# Altium PCB PCB1.PcbDoc
Units mil, origin at the board's own origin, x right, y up, seen from the top; angles counter-clockwise.
Board outline 3890 x 1915 mil, 2 copper layers (Top Layer, Bottom Layer); 30 components, 19 nets, 76 pads, 0 vias.
Unrouted connection lines stored in the file: 55.
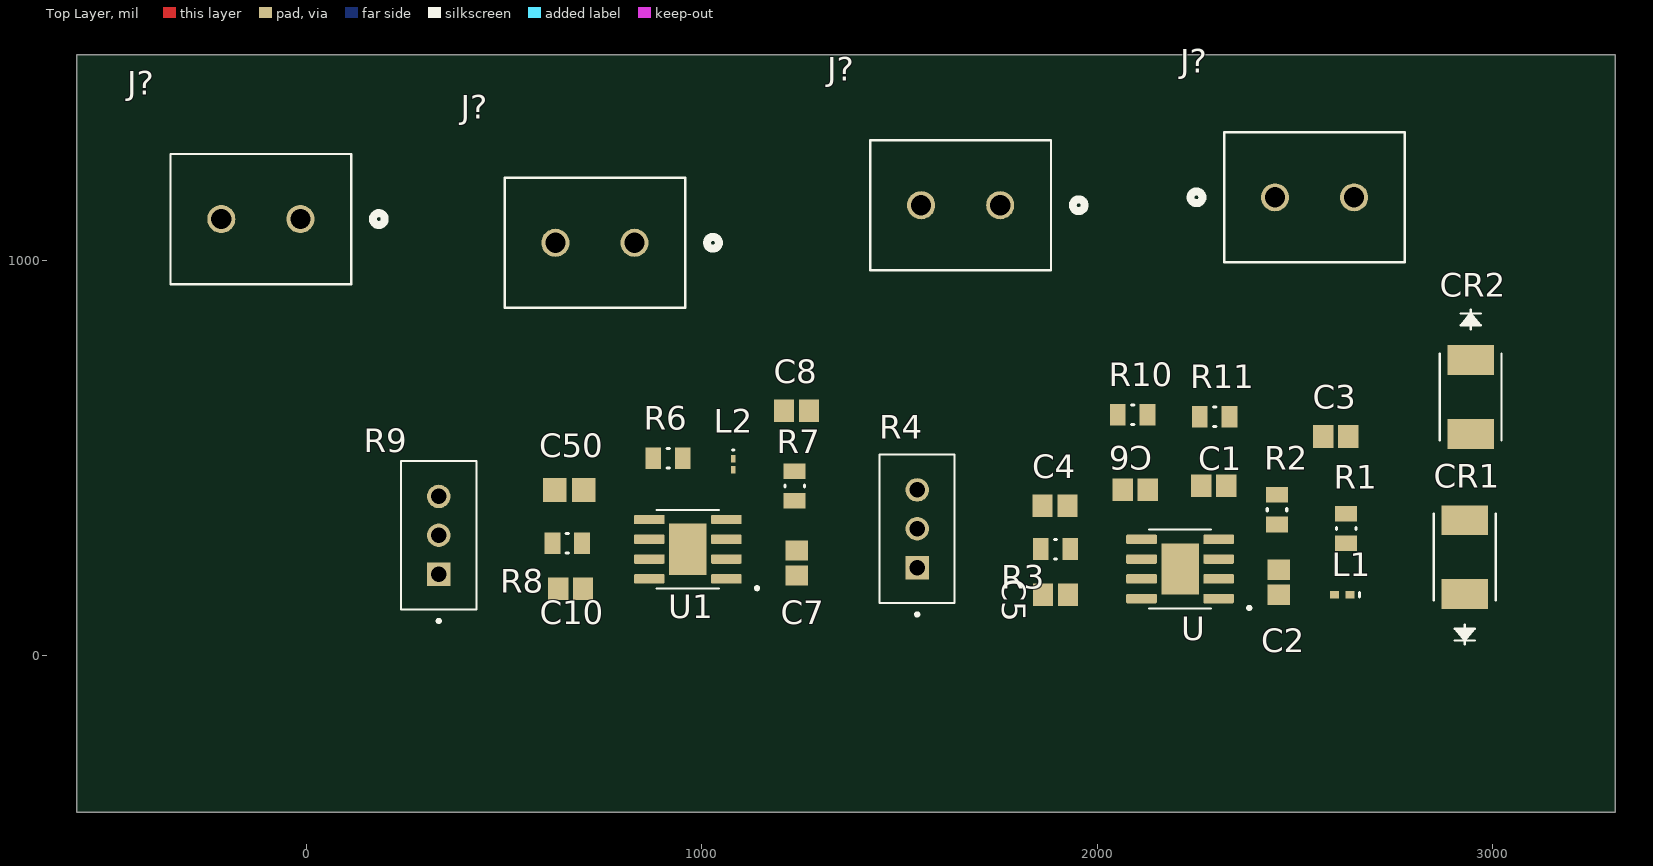
[diagram p0: Top Layer view]
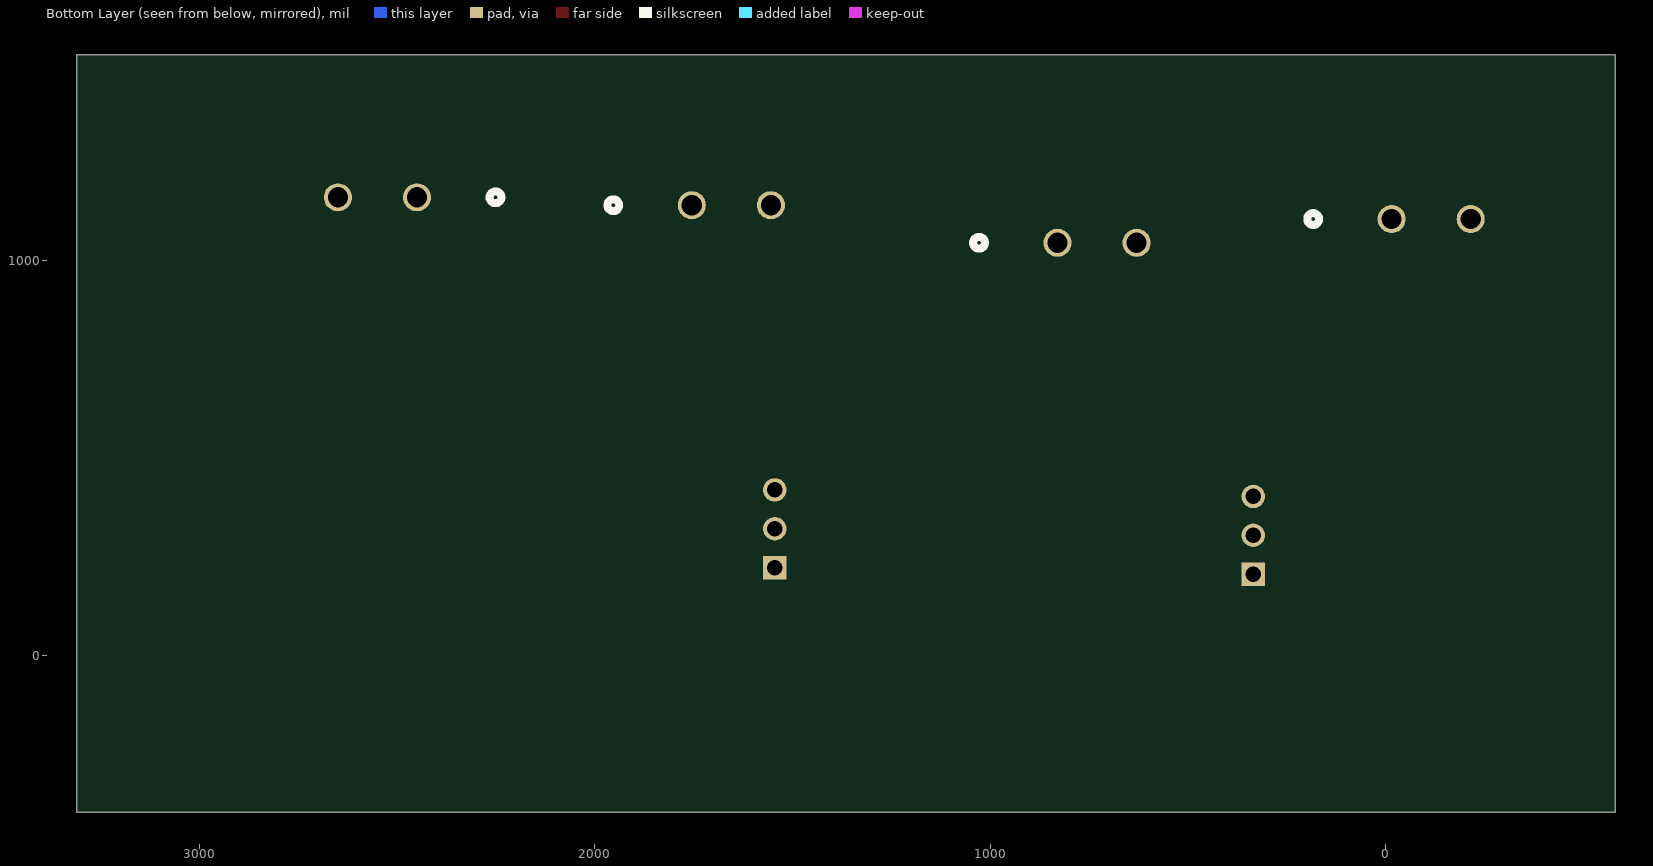
[diagram p1: Bottom Layer view, seen from below]

## Layer stack, top to bottom
Top Solder: solder mask 0.4, Solder Resist, Dk 3.5
Top Layer: signal copper 1.4
Dielectric 1: dielectric 12.6, FR-4, Dk 4.8
Bottom Layer: signal copper 1.4
Bottom Solder: solder mask 0.4, Solder Resist, Dk 3.5

## Board outline
-580,-395 3310,-395 3310,1520 -580,1520

## Design rules (kind name [scope] priority, off if disabled: settings)
Clearance [All] p1: gap=10 ignorepadtopadclearanceinfootprint=FALSE except(0: Arc-Hole Track-Hole SMDPad-Hole THPad-Hole Via-Hole Fill-Hole Poly-Hole Region-Hole Text-Hole)
PolygonConnect [All] p1: connectstyle=Relief reliefconductorwidth=10 reliefentries=4 polygonreliefangle="90 Angle" airgapwidth=10
RoomDefinition Powerboard_schematic [InComponentClass('Powerboard_schematic')] p1: confinementstyle=ConfineIn formatcopy=TRUE lockcomponents=FALSE outline 5930,-335 6350,-335 6350,150 5930,150
RoutingVias [All] p1: holewidth=28 width=50 viastyle="Through Hole" minholewidth=28 minwidth=50 maxholewidth=28 maxwidth=50
SolderMaskExpansion [All] p1: expansion=4 istentingtop=FALSE
Width [All] p1: maxlimit=10 minlimit=10 preferedwidth=10
30 further rules are at their usual default settings.

## Classes and differential pairs
component class Powerboard_schematic: C1 C2 C3 C4 C5 C6 C7 C8 C10 C50 CR1 CR2 J? L1 L2 R1 R2 R3 R4 R6 R7 R8 R9 R10 R11 U U1

## Components (designator, comment, footprint, x,y, rotation, side; value= is the part's Value field where it differs from the comment)
C1 "08055C104K4Z2A" CAPC2013X140X50NL20T25 2295,430 r180 top
C2 "08055C104K4Z2A" CAPC2013X140X50NL20T25 2460,186.5 r270 top
C3 "08055C104K4Z2A" CAPC2013X140X50NL20T25 2603.5,555 r0 top
C4 "08055C104K4Z2A" CAPC2013X140X50NL20T25 1893.5,380 r180 top
C5 "08055C104K4Z2A" CAPC2013X140X50NL20T25 1895,155 r0 top
C6 "08055C104K4Z2A" CAPC2013X140X50NL20T25 2096.5,420 r180 top
C7 "08055C104K4Z2A" CAPC2013X140X50NL20T25 1240,235 r270 top
C8 "08055C104K4Z2A" CAPC2013X140X50NL20T25 1240,620 r180 top
C10 "08055C104K4Z2A" CAPC2013X140X50NL20T25 668.5,170 r0 top
C50 "VJ0805A1R0CXACW1BC" CAPC2013X145X48ML20T23 665,420 r0 top
CR1 "SD2114S040S8R0" SD2114_AVX 2930,250 r90 top
CR2 "SD2114S040S8R0" SD2114_AVX 2945,655 r270 top
J? "691213510002" CONN_691213510002_WRE 1755,1140 r180 top
J? "691213510002" CONN_691213510002_WRE -15,1105 r180 top
J? "691213510002" CONN_691213510002_WRE 830,1045 r180 top
J? "691213510002" CONN_691213510002_WRE 2450,1160 r0 top
L1 "CTDO1813PF-223HC" 0402-A 2620,155 r180 top
L2 "CTDO1813PF-223HC" 0603 1080,485 r270 top
R1 "CRCW08051M00FKEA" FP-CRCW0805-e3-IPC_B 2630,322.44 r90 top
R2 "CRCW08051M00FKEA" FP-CRCW0805-e3-IPC_B 2455,370 r90 top
R3 "CRCW08051M00FKEA" FP-CRCW0805-e3-IPC_B 1895,270 r0 top
R4 "PV36W105C01B00" TRIM_PV36W105C01B00 1545,321.58 r90 top
R6 "CRCW08051M00FKEA" FP-CRCW0805-e3-IPC_B 915,500 r0 top
R7 "CRCW08051M00FKEA" FP-CRCW0805-e3-IPC_B 1235,430 r90 top
R8 "CRCW08051M00FKEA" FP-CRCW0805-e3-IPC_B 660,285 r0 top
R9 "PV36W105C01B00" TRIM_PV36W105C01B00 335,305 r90 top
R10 "CRCW08051M00FKEA" FP-CRCW0805-e3-IPC_B 2090,610 r180 top
R11 "CRCW08051M00FKEA" FP-CRCW0805-e3-IPC_B 2297.44,605 r180 top
U "AOZ1284PI" SOP127P600X170-9N 2210,220 r180 top
U1 "AOZ1284PI" SOP127P600X170-9N 965,270 r180 top

## Footprints (in the part's own frame and the unit in brackets; to place one, negate y for a bottom-side part, rotate by r counter-clockwise, add the part's x,y. Pads: shape width x height; smd on the part's side, far side on the other; paste and mask are expansions set on the pad)
0402-A [mm] "Chip Inductor, Body 1.0x0.5mm, IPC High Density"
  rect 0.6x0.5 smd: 1(-0.5,0) 2(0.5,0)
  silkscreen extent -1.1,-0.15 -1.1,0.15, body extent -0.55,-0.3 0.55,0.3, height 0.55
0603 [mm] "Chip Inductor, Body 0.6x0.3mm, IPC High Density"
  rect 0.5x0.3 smd: 1(-0.35,0) 2(0.35,0)
  silkscreen extent -0.9,-0.05 -0.9,0.05, body extent -0.33,-0.18 0.33,0.18, height 0.55
CAPC2013X140X50NL20T25 [mm] "Chip Capacitor, 2-Leads, Body 2.00x1.25mm, IPC Medium Density"
  rect 1.3x1.45 smd: 1(-0.8,0) 2(0.8,0)
  body extent -1.1,-0.72 1.1,0.72, height 1.4
CAPC2013X145X48ML20T23 [mm] "Chip Capacitor, 2-Leads, Body 2.00x1.25mm, IPC Low Density"
  rect 1.5x1.55 smd: 1(-0.925,0) 2(0.925,0)
  body extent -1.1,-0.72 1.1,0.72, height 1.45
CONN_691213510002_WRE [mil]
  round 71 hole 51 mask+0: 1(0,0) 2(200,0)
  silkscreen extent -214,-165 328,165, body extent 0,0 10,10, height 10
FP-CRCW0805-e3-IPC_B [mil]
  rect 39.63x55.44 smd paste+0 mask+0: 1(-37.44,0) 2(37.43,0)
  silkscreen extent -3,-25 3,25, body extent -67,-38 67,38, height 10
SD2114_AVX [mil]
  rect 75.5x118 smd paste+0 mask+0: 1(-93.25,0) 2(93.25,0)
  silkscreen extent -221,-78 110,78, body extent -104,-73 104,73, height 47
SOP127P600X170-9N [mm]
  rrect25% 1.97x0.6 smd: 1(-2.475,1.905) 2(-2.475,0.635) 3(-2.475,-0.635) 4(-2.475,-1.905) 5(2.475,-1.905) 6(2.475,-0.635) 7(2.475,0.635) 8(2.475,1.905)
  rect 2.41x3.3 smd paste-3: 9(0,0)
  silkscreen extent -4.54,-2.53 2,2.6
TRIM_PV36W105C01B00 [mm]
  rect 1.508x1.508 hole 1: 1(-2.5,0)
  round 1.508 hole 1: 2(0,0) 3(2.5,0)
  silkscreen extent -5.6,-2.41 4.77,2.42, body extent -3.15,-1.6 3.15,1.6, height 0.7

## Part data
C1 C2 C3 C4 C5 C6 C7 C8 C10: library part CMP-2007-04629-1, Manufacturer="AVX Interconnect / Elco", Part Number=08055C104K4Z2A
C50: library part CMP-2007-03057-1, Manufacturer=Vitramon, Part Number=VJ0805A1R0CXACW1BC
CR1 CR2: "No Description Available", Mfr_Name="KYOCERA AVX", Copyright="Copyright (C) 2022 Ultra Librarian. All rights reserved.", Digi-Key_Part_Number_1=478-7817-1-ND, Digi-Key_Part_Number_2=478-7817-2-ND, Digi-Key_Part_Number_3=478-7817-6-ND, Manufacturer_Part_Number=SD2114S040S8R0, RefDes=RefDes, Type=DEV
J? J? J? J?: "No Description Available", Mfr_Name="Wurth Electronics", Copyright="Copyright (C) 2023 Ultra Librarian. All rights reserved.", Digi-Key_Part_Number_1=732-691213510002-ND, Manufacturer_Part_Number=691213510002, RefDes=RefDes, Type=DEV
L1 L2: "No Description Available", Mfr_Name="Central Technologies", Copyright="Copyright (C) 2022 Ultra Librarian. All rights reserved.", Digi-Key_Part_Number_1=4161-CTDO1813PF-223HC-ND, Manufacturer_Part_Number=CTDO1813PF-223HC, RefDes=RefDes, Type=DEV
R1 R2 R3 R6 R7 R8 R10 R11: library part CMP-2001-03630-2, "RES Thick Film, 1MΩ, 1%, 0.125W, 100ppm/°C, 0805", Case Code (Imperial)=0805, Case Code (Metric)=2012, Max Operating Temperature=155°C, Min Operating Temperature=-55°C, Package Quantity=5000, Power Rating=125mW, Resistance=1MR, Temperature Coefficient=100ppm/°C, Tolerance=1%, Voltage Rating=150V, Case/Package=0805, Composition="Thick Film", Contact Plating=Tin, Depth=1.25mm, Height=0.45mm, Lead Free="Lead Free", Length=2mm, Military Standard=Not, Mount="Surface Mount", Number of Pins=2, Packaging="Tape and Reel", Radiation Hardening=No, Termination=SMD/SMT, Voltage Rating (DC)=150V, Weight=0.000194oz, Width=1.25mm
R4 R9: "No Description Available", Mfr_Name=Murata, Copyright="Copyright (C) 2022 Ultra Librarian. All rights reserved.", Digi-Key_Part_Number_1=490-2877-ND, Manufacturer_Part_Number=PV36W105C01B00, RefDes=RefDes, Type=DEV
U U1: "Buck Switching Regulator IC Positive Adjustable 0.8V 1 Output 4A 8-SOIC _0.154, 3.90mm Width_ Exposed Pad", Package="SO-8 Alpha &amp; Omega Semiconductor", Availability=Unavailable, MF="Alpha &", MP=AOZ1284PI, Price=None, SnapEDA_Link=https://www.snapeda.com/parts/AOZ1284PI/Alpha%20%26%20Omega%20Semiconductor%20Inc./view-part/473739/?ref=snap

## Nets (pads, with @x,y where several pads share a name; then routed paths per layer and width w, separated by ;. In a path a pad name is that pad's centre, name@x,y a point inside that pad or via, vN(x,y) a via of type N, cw(c..) or ccw(c..) an arc to the next point about the centre after c; other vN are vias at no path point)
GND: C1.1 C3.1 C5.1 C6.1 C8.1 C10.1 CR1.2 CR2.2 J?.2 R2.1 R3.1 R4.2 R7.1 R8.1 R9.2 R11.1 U1.3 U1.8 U.3 U.8
NetC1_2: C1.2 C6.2 J?.1@2450,1160 R10.2 U1.9 U.9
NetC2_1: C2.1 U.2
NetC2_2: C2.2 CR1.1 L1.2 U.1
NetC3_2: C3.2 J?.1@1755,1140 L1.1 R1.2
NetC4_1: C4.1 U.5
NetC4_2: C4.2 R4.3
NetC5_2: C5.2 U.7
NetC7_1: C7.1 U1.2
NetC7_2: C7.2 CR2.1 L2.2 U1.1
NetC8_2: C8.2 J?.1@-15,1105 L2.1 R6.2
NetC10_2: C10.2 U1.7
NetC50_1: C50.1 R9.3
NetC50_2: C50.2 U1.5
NetJ?_1: J?.1@830,1045 R10.1 R11.2
NetR1_1: R1.1 R3.2 U.6
NetR2_2: R2.2 U.4
NetR6_1: R6.1 R8.2 U1.6
NetR7_2: R7.2 U1.4
pads on no net: R4.1 R9.1